# Altium PCB LMT70YFQR.PcbDoc
Units mm, origin at the board's own origin, x right, y up, seen from the top; angles counter-clockwise.
Board outline 10.16 x 8.51 mm, 2 copper layers (Top Layer, Bottom Layer); 2 components, 7 nets, 7 pads, 4 vias.
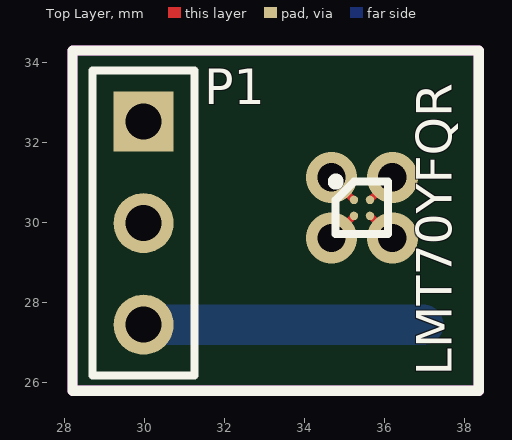
[diagram p0: Top Layer view]
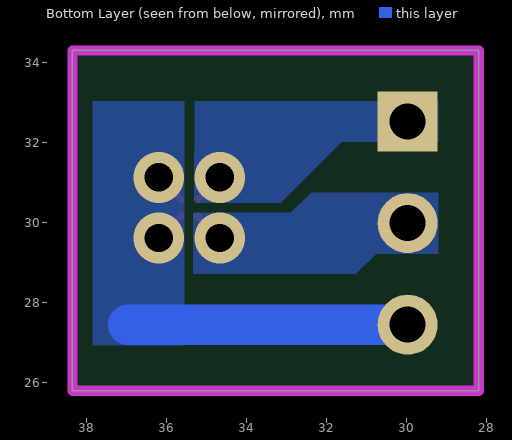
[diagram p1: Bottom Layer view, seen from below]

## Layer stack, top to bottom
Top Solder: solder mask 0.0102, Solder Resist, Dk 3.5
Top Layer: signal copper 0.0356
Dielectric 1: dielectric 0.32, FR-4, Dk 4.8
Bottom Layer: signal copper 0.0356
Bottom Solder: solder mask 0.0102, Solder Resist, Dk 3.5

## Board outline
28.194,25.781 38.354,25.781 38.354,34.29 28.194,34.29

## Design rules (kind name [scope] priority, off if disabled: settings)
Clearance [All] p1: gap=0.203 ignorepadtopadclearanceinfootprint=FALSE except(0: Arc-Hole Track-Hole SMDPad-Hole THPad-Hole Via-Hole Fill-Hole Poly-Hole Region-Hole Text-Hole; 0.152: SMDPad-SMDPad)
MinimumSolderMaskSliver [All] p1 off: minsoldermaskwidth=0.254
PlaneConnect [All] p1: planeconnectstyle=Direct reliefexpansion=0.508 reliefentries=4 reliefconductorwidth=0.254 reliefairgap=0.254
PolygonConnect [All] p1: connectstyle=Direct reliefconductorwidth=0.254 reliefentries=4 polygonreliefangle="90 Angle" airgapwidth=0.254
RoutingVias [All] p1: holewidth=0.711 width=1.27 viastyle="Through Hole" minholewidth=0.711 minwidth=1.27 maxholewidth=0.711 maxwidth=1.27
SilkToSilkClearance [All] p1 off: silktosilkclearance=0.254
SilkToSolderMaskClearance [IsPad] p1 off: minsilkscreentomaskgap=0.254 clearancetoexposedcopper=TRUE
SolderMaskExpansion [All] p1: expansion=0.102
Width [All] p1: maxlimit=1.016 minlimit=0.178 preferedwidth=0.254 minimp=50.000000 maximp=50.000000 favimp=50.000000
26 further rules are at their usual default settings.

## Components (designator, comment, footprint, x,y, rotation, side; value= is the part's Value field where it differs from the comment)
LMT70YFQR "LMT70YFQR" BGA4C40P2X2_88X88X68 35.433,30.353 r0 top
P1 "Header 3" HDR1X3 29.972,32.512 r270 top

## Footprints (in the part's own frame and the unit in brackets; to place one, negate y for a bottom-side part, rotate by r counter-clockwise, add the part's x,y. Pads: shape width x height; smd on the part's side, far side on the other; paste and mask are expansions set on the pad)
BGA4C40P2X2_88X88X68 [mm]
  round 0.212 smd: A1(-0.2,0.2) A2(0.2,0.2) B1(-0.2,-0.2) B2(0.2,-0.2)
  silkscreen extent -0.76,-0.66 0.66,0.76, body extent -0.44,-0.44 0.44,0.44, height 0.67
HDR1X3 [mm] "Connector; Header; 3 Position"
  rect 1.5x1.5 hole 0.9: 1(0,0)
  round 1.5 hole 0.9: 2(2.54,0) 3(5.08,0)
  silkscreen extent -1.27,-1.27 6.35,1.27

## Part data
LMT70YFQR: "Integrated Circuit", Manufacturer_Name="Texas Instruments", Mouser Part Number=595-LMT70YFQR, Arrow Part Number=LMT70YFQR, Arrow Price/Stock=https://www.arrow.com/en/products/lmt70yfqr/texas-instruments, Datasheet Link=http://www.ti.com/lit/gpn/lmt70, Height=0.675mm, Manufacturer_Part_Number=LMT70YFQR, Mouser Price/Stock=https://www.mouser.co.uk/ProductDetail/Texas-Instruments/LMT70YFQR?qs=jpHf3Ogds1xPpU553AtQFw%3D%3D
P1: "Header, 3-Pin", LatestRevisionDate=17-Jul-2002, LatestRevisionNote="Re-released for DXP Platform.", Publisher="Altium Limited"

## Via types
v1: diameter 1.27, hole 0.711, Top Layer to Bottom Layer, 4 vias

## Nets (pads, with @x,y where several pads share a name; then routed paths per layer and width w, separated by ;. In a path a pad name is that pad's centre, name@x,y a point inside that pad or via, vN(x,y) a via of type N, cw(c..) or ccw(c..) an arc to the next point about the centre after c; other vN are vias at no path point)
3V3: LMT70YFQR.A2 LMT70YFQR.B2 P1.3 | length 8.9
  Top Layer w0.178: LMT70YFQR.A2 v1(36.195,31.115) ; LMT70YFQR.B2@35.64,30.16 LMT70YFQR.B2 35.642,30.153 v1(36.195,29.6)
  Bottom Layer w0.254: 36.957,27.432 37.211,27.686
  Bottom Layer w1.016: P1.3 36.957,27.432
5V: 
A1: 
A3: LMT70YFQR.B1 P1.2 | length 0.9
  Top Layer w0.178: v1@34.549,29.6 34.68,29.6 LMT70YFQR.B1
  other v1: 34.671,29.6
A4: 
A5: 
GND: LMT70YFQR.A1 P1.1 | length 0.8
  Top Layer w0.178: v1(34.671,31.115) 34.671,31.106 35.224,30.553 LMT70YFQR.A1

## Polygon pours and split planes (outlines as drawn)
A3 on Bottom Layer "Bottom Layer-A3" (solid, pour order 8): 29.21,30.734 32.385,30.734 32.893,30.226 35.332,30.226 35.332,28.702 31.268,28.702 30.76,29.21 29.21,29.21
GND on Bottom Layer "Bottom Layer-GND" (solid, pour order 6): 35.29,33.02 35.311,30.481 33.147,30.481 31.624,32.004 29.21,32.004 29.21,33.02
3V3 on Bottom Layer "Bottom Layer-3V3" (solid, pour order 4): 35.56,33.02 37.846,33.02 37.846,26.924 35.56,26.924

## Keep-outs
Keep-Out Layer:
  the board outline again, w0.254

## Silkscreen, mask and mechanical layers (free items; w line width, h text height)
Top Overlay:
  the board outline again, w0.254